# Altium PCB PCB1.PcbDoc
Units mil, origin at the board's own origin, x right, y up, seen from the top; angles counter-clockwise.
Board outline 6000 x 4000 mil, 2 copper layers (Top Layer, Bottom Layer); 46 components, 33 nets, 139 pads, 44 vias.
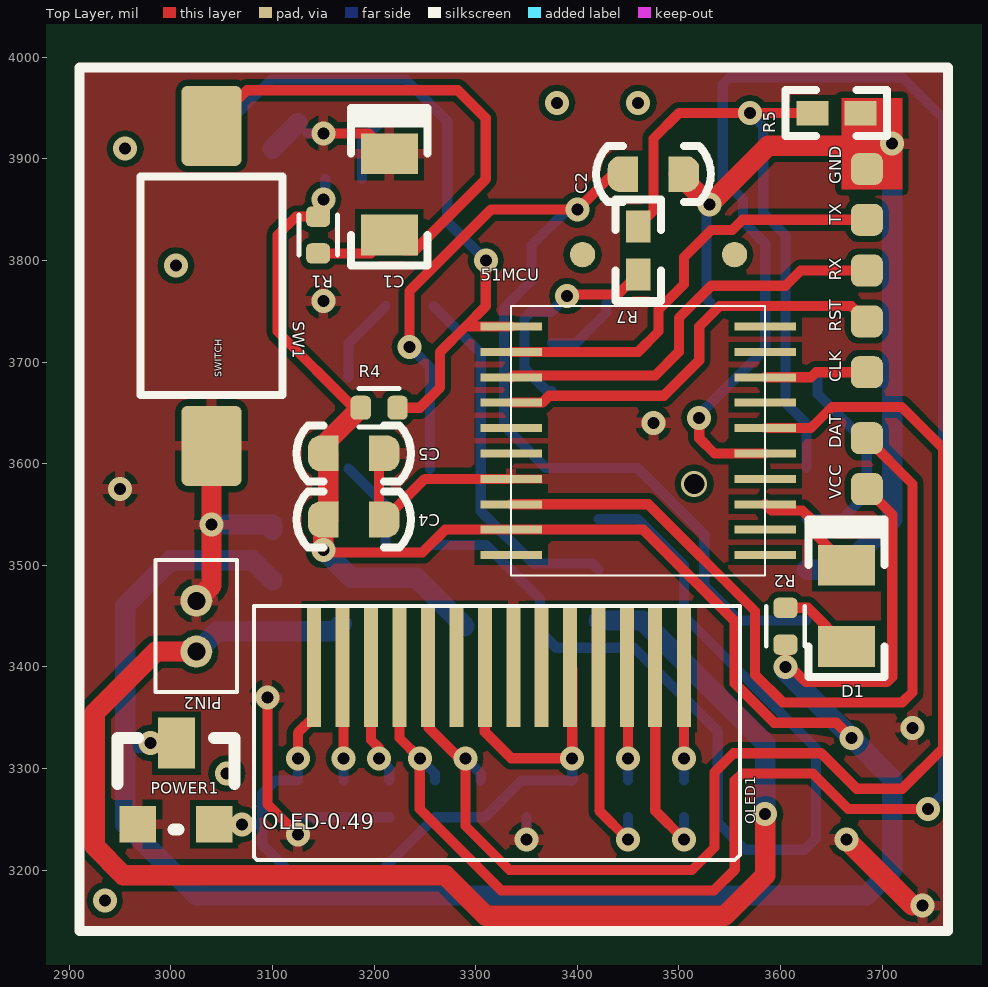
[diagram p0: Top Layer view]
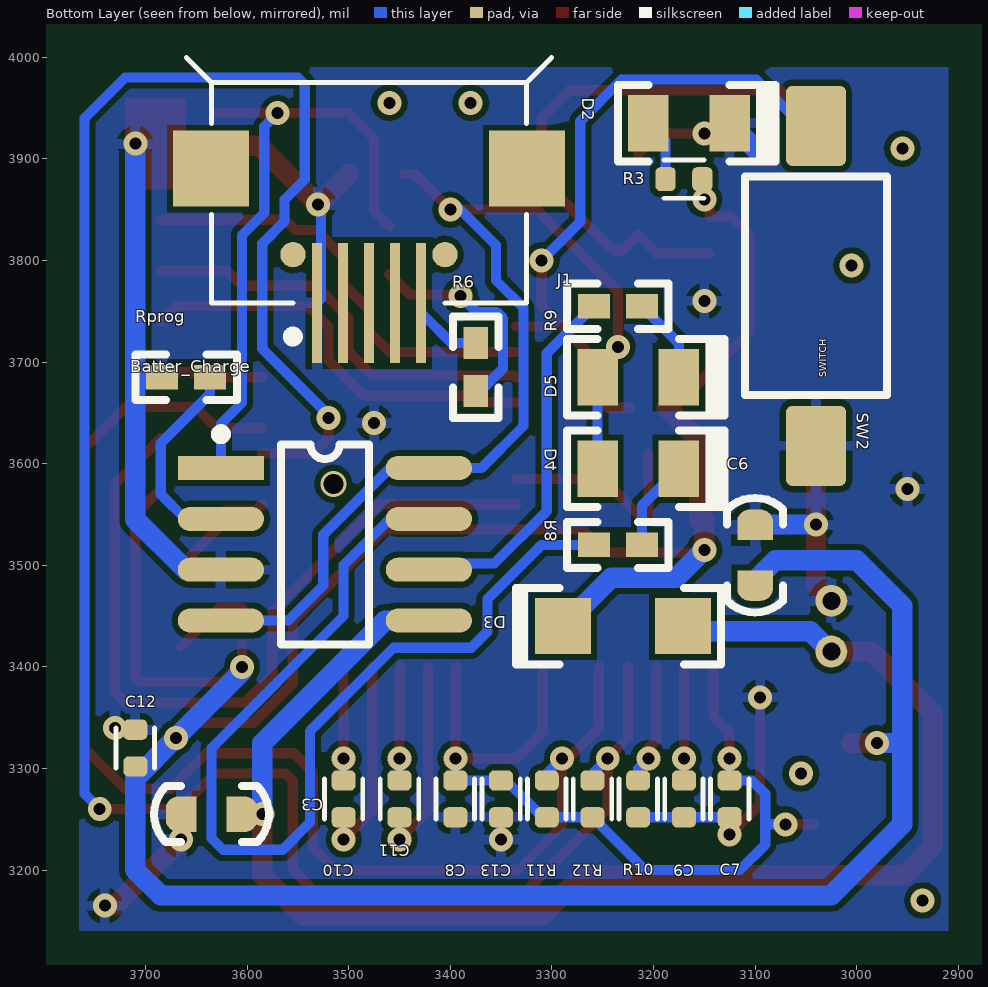
[diagram p1: Bottom Layer view, seen from below]

## Layer stack, top to bottom
Top Layer: signal copper 1.4
Dielectric: dielectric 12.6, FR-4, Dk 4.8
Bottom Layer: signal copper 1.4

## Board outline
1000,1000 7000,1000 7000,5000 1000,5000

## Design rules (kind name [scope] priority, off if disabled: settings)
Clearance [All] p1: gap=6
HoleSize [All] p1 off: absolutevalues=TRUE maxlimit=100 minlimit=1 maxpercent=80.000 minpercent=20.000
HoleToHoleClearance [All] p1 off: gap=0 allowstackedmicrovias=TRUE
LayerPairs [All] p1 off: enforce=TRUE
MinimumSolderMaskSliver [All] p1 off: minsoldermaskwidth=0
NetAntennae [All] p1 off: netantennaetolerance=0
PolygonConnect [All] p1: connectstyle=Relief reliefconductorwidth=10 reliefentries=4 polygonreliefangle="90 Angle"
RoutingVias [All] p1: holewidth=28 width=50 viastyle="Through Hole" minholewidth=28 minwidth=50 maxholewidth=28 maxwidth=50
SilkToSilkClearance [All] p1 off: silktosilkclearance=0
SilkscreenOverComponentPads [All] p1 off: minsilkscreentomaskgap=0
SolderMaskExpansion [All] p1: expansion=4
Width [All] p1: maxlimit=50 minlimit=10 preferedwidth=10
21 further rules are at their usual default settings.

## Components (designator, comment, footprint, x,y, rotation, side; value= is the part's Value field where it differs from the comment)
51MCU "N76E003 TSSOP20" TSSOP20 34260,21490 r0 top
Batter_Charge "TP4056 SOP8" SOP8 3525,3615 r270 bottom
C1 "10U" 0805P 3215,3865 r90 top
C2 "10uF" 0603C 3475,3885 r0 top
C3 "10uF" 0603C 3635,3255 r180 bottom
C4 "104" 0603C 3180,3545 r180 top
C5 "102" 0603C 3180,3610 r180 top
C6 "104" 0603C 3100,3510 r270 bottom
C7 "0.1uF" CAP_0402_SMD 3125,3270 r90 bottom
C8 "0.01uF" CAP_0402_SMD 3395,3270 r270 bottom
C9 "0.01uF" CAP_0402_SMD 3170,3270 r270 bottom
C10 "0.01uF" CAP_0402_SMD 3505,3270 r270 bottom
C11 "0.01uF" CAP_0402_SMD 3450,3270 r270 bottom
C12 "0.01uF" CAP_0402_SMD 3710,3320 r90 bottom
C13 "0.01uF" CAP_0402_SMD 3350,3270 r270 bottom
CLK "TestDot" Single-Dot 3685,3690 r90 top
D1 "LED" 0805P 3665,3460 r90 top
D2 "LED" 0805P 3165,3935 r180 bottom
D3 "0.34V" 1206D 3230,3440 r0 bottom
D4 "LED" 0805P 3215,3595 r180 bottom
D5 "LED" 0805P 3215,3685 r180 bottom
DAT "TestDot" Single-Dot 3685,3625 r90 top
GND "TestDot" Single-Dot 3685,3890 r90 top
J1 "Micro-USB" Micro-USB 3470,3875 r90 bottom
OLED1 "OLED-0.49" OLED-0.49 3505,3400 r180 top
PIN2 "P2-1.27mm" Pin2-1.27mm 3025,3465 r270 top
POWER1 "662K-SOT23" SOT-23 3005,3275 r0 top
R1 "10K" RES_0402_SMD 3145,3825 r90 top
R2 "1K" RES_0402_SMD 3605,3440 r270 top
R3 "1K" RES_0402_SMD 3170,3880 r180 bottom
R4 "10K" RES_0402_SMD 3205,3655 r180 top
R5 "1K" 0402 3655,3945 r180 top
R6 "0.4" 0402 3375,3695 r270 bottom
R7 "1K" 0402 3460,3810 r90 top
R8 "1K" 0402 3235,3520 r180 bottom
R9 "1K" 0402 3235,3755 r180 bottom
R10 "1K" RES_0402_SMD 3215,3270 r90 bottom
R11 "4.7K" RES_0402_SMD 3305,3270 r270 bottom
R12 "4.7K" RES_0402_SMD 3260,3270 r270 bottom
Rprog "1K" 0402 3660,3685 r180 bottom
RST "TestDot" Single-Dot 3685,3740 r90 top
RX "TestDot" Single-Dot 3685,3790 r90 top
SW1 "switch" SWITCH-微型 3040,3775 r90 top
SW2 "switch" SWITCH-微型 3040,3775 r90 bottom
TX "TestDot" Single-Dot 3685,3840 r90 top
VCC "TestDot" Single-Dot 3685,3575 r90 top

## Footprints (in the part's own frame and the unit in brackets; to place one, negate y for a bottom-side part, rotate by r counter-clockwise, add the part's x,y. Pads: shape width x height; smd on the part's side, far side on the other; paste and mask are expansions set on the pad)
0402 [mm]
  rect 0.8x0.61 smd: 1(-0.6,0) 2(0.6,0)
  silkscreen extent -1.27,-0.57 1.27,0.57, body extent -0.48,-0.3 0.5,0.3, height 0.3
0603C [mil]
  rrect80% 30x35 smd: 1(-30,0) 2(30,0)
  rect 20x35 smd: 1(-25,0) 2(25,0)
  silkscreen extent -56,-28 56,28, body extent -31,-16 31,16, height 16
0805P [mil]
  rect 40x56 smd: 1(-40,0) 2(40,0)
  silkscreen extent -70,-38 85,38, body extent -41,-26 42,26, height 20
1206D [mm]
  rect 1.4x1.4 smd: 1(-1.5,0) 2(1.5,0)
  silkscreen extent -2.45,-0.95 2.68,0.96, body extent -1.48,-0.82 1.6,0.82, height 1.3
CAP_0402_SMD [mm] "Capacitor, Polarized, Chip; 1.00 mm L X 0.50 mm W X 0.35 mm H body"
  rrect51% 0.51x0.6 smd: 1(-0.46,0) 2(0.46,0)
  silkscreen extent -0.5,-0.48 0.5,0.48, body extent -0.53,-0.28 0.51,0.28, height 0.53
Micro-USB [mm]
  rect 3x0.25 smd: 1(-2.968,1.554) 2(-2.968,0.904) 3(-2.968,0.254) 4(-2.968,-0.396) 5(-2.968,-1.046)
  round 0.635 all layers, no hole: MH1(-1.76,2.154) MH2(-1.76,-1.646)
  rect 1.9x1.9 smd: ""(0.39,-3.696) ""(0.39,4.204)
  silkscreen extent -3.93,-4.31 3.17,4.82, body extent -2.83,-3.59 2.6,4.39, height 2.73
OLED-0.49 [mm]
  rect 0.35x3 smd: 1(0,0) 2(0.725,0) 3(1.422,0) 4(2.134,0) 5(2.845,0) 6(3.556,0) 7(4.267,0) 8(4.978,0) 9(5.69,0) 10(6.401,0) 11(7.112,0) 12(7.823,0) 13(8.534,0) 14(9.246,0)
  silkscreen extent -1.4,-1.52 10.74,4.83
Pin2-1.27mm [mm]
  round 0.8 hole 0.45: 1(0,0) 2(1.27,0)
  silkscreen extent -1.02,-1.02 2.29,1.02
RES_0402_SMD [mm] "Resistor, Chip; 1.00 mm L X 0.50 mm W X 0.35 mm H body"
  rrect51% 0.51x0.6 smd: 1(-0.46,0) 2(0.46,0)
  silkscreen extent -0.5,-0.48 0.5,0.48, body extent -0.53,-0.28 0.53,0.28, height 0.41
Single-Dot [mm]
  rrect50% 0.8x0.8 smd: 1(0,0)
SOP8 [mil]
  rect 23.62x85 smd: 1(19.45,-100.71)
  oval 23.62x85 smd: 2(69.45,-100.71) 3(119.45,-100.71) 4(169.45,-100.71) 5(169.45,104.02) 6(119.45,104.02) 7(69.45,104.02) 8(19.45,104.02)
  silkscreen extent -19,-106 193,45
SOT-23 [mil]
  rect 36x36 smd: 1(-37.48,-30.03) 2(37.52,-30.03)
  rect 36x50 smd: 3(0.52,49.97)
  silkscreen extent -57,-35 58,55
SWITCH-微型 [mm]
  rrect20% 2x1.5 smd: 1(-4,0) 2(4,0)
  silkscreen extent -2.73,-1.78 2.73,1.78, body extent -2.8,-1.8 2.8,1.8, height 2.61
TSSOP20 [mil]
  rect 60.71x7.87 smd: 1(-30925,-17755) 2(-30925,-17780) 3(-30925,-17805) 4(-30925,-17830) 5(-30925,-17855) 6(-30925,-17880) 7(-30925,-17905) 8(-30925,-17930) 9(-30925,-17955) 10(-30925,-17980) 11(-30675,-17980) 12(-30675,-17955) 13(-30675,-17930) 14(-30675,-17905) 15(-30675,-17880) 16(-30675,-17855) 17(-30675,-17830) 18(-30675,-17805) 19(-30675,-17780) 20(-30675,-17755)
  silkscreen extent -30925,-18000 -30675,-17735

## Part data
C7 C8 C9 C10 C11 C12 C13: library part Cap, "Capacitor"
R1 R2 R3 R4 R10 R11 R12: library part Res2, "Resistor"
R5 R6 R7 R8 R9 Rprog: library part resistor

## Via types
v1: diameter 23.6, hole 11.8, Top Layer to Bottom Layer, 43 vias
v2: diameter 25.6, hole 20, Top Layer to Bottom Layer, 1 vias

## Nets (pads, with @x,y where several pads share a name; then routed paths per layer and width w, separated by ;. In a path a pad name is that pad's centre, name@x,y a point inside that pad or via, vN(x,y) a via of type N, cw(c..) or ccw(c..) an arc to the next point about the centre after c; other vN are vias at no path point)
BAT+: Batter_Charge.5 C3.2 D3.1 PIN2.2 | length 1460.3
  Top Layer w20: PIN2.2 2985,3415 2925,3355 2925,3223.2 2953.2,3195 3270,3195 3310,3155 3545,3155 3585,3195 v1(3585,3255)
  Bottom Layer w20: PIN2.2 3025.56,3415 3045.56,3435 3160.95,3435 D3.1@3168.44,3442.5 ; Batter_Charge.5 3464.45,3445.55 3585,3325 v1(3585,3255)
C1N: C11.2 OLED1.4 | length 203.9
  Top Layer w10: OLED1.4 3421.8,3399.2 3421.8,3258.2 v1(3450,3230)
  Bottom Layer w10: v1(3450,3230) C11.2
C1P: C11.1 OLED1.3 | length 112.3
  Top Layer w10: OLED1.3 3450,3399 v1(3450,3310)
  Bottom Layer w10: C11.1 v1(3450,3310)
C2N: C10.2 OLED1.2 | length 203.7
  Top Layer w10: OLED1.2 3476.8,3399.66 3476.8,3258.2 v1(3505,3230)
  Bottom Layer w10: v1(3505,3230) C10.2
C2P: C10.1 OLED1.1 | length 111.9
  Top Layer w10: v1(3505,3310) OLED1.1
  Bottom Layer w10: C10.1 v1(3505,3310)
GND: 51MCU.7 Batter_Charge.3 C1.2 C2.2 C3.1 C4.1 C5.1 C6.1 C7.1 C8.2 C9.2 C12.2 C13.2 D2.2 GND.1 J1.1 OLED1.7 PIN2.1 POWER1.1 R5.1 R10.1 Rprog.1 SW1.1 SW2.1 | length 1792.1
  Top Layer w10: v1(3095,3370) 3095,3265 v1(3125,3235) ; v1(3150,3925) 3195,3925 C1.2 ; C5.1@3205,3610 3205,3545 3210,3545 3250,3585 51MCU.7 ; v1@3730,3165 v1(3740,3165)
  Top Layer w20: PIN2.1 3040,3480 v1(3040,3540) SW1.1 ; C2.2@3500,3885 v1(3530,3855) 3588,3913 3708,3913 v1(3710,3915) ; v1(3665,3230) v1@3730,3165
  Bottom Layer w10: v1(3125,3235) C7.1 C9.2 R10.1 ; D2.2@3135,3925 v1(3150,3925) ; v1(3350,3230) C13.2 ; v1(3530,3855) 3527.3,3852.3 3527.3,3762.03 J1.1
  Bottom Layer w20: PIN2.1 PIN2.1@3030,3465 ; v1(3040,3540) 3095,3540 3100,3535 C6.1@3100,3540 ; 3100,3910 D2.2 ; Batter_Charge.3 3660.55,3495.55 3710,3545 3710,3685 ; Rprog.1 3710,3685 ; v1(3710,3915) 3710,3685
  other v1: 3730,3340 2950,3575 3475,3640 3150,3760
IREF: OLED1.12 R10.2 | length 119.3
  Top Layer w10: OLED1.12 3197,3328 3205,3320 v1(3205,3310)
  Bottom Layer w10: v1(3205,3310) 3215,3300 R10.2
KEY_MONITER: 51MCU.1 R4.1 SW2.2 | length 659.5
  Top Layer w10: R4.1 3245,3655 3265,3675 3265,3710 3290,3735 ; v1(3310,3800.04) 3310,3755 3290,3735 ; 51MCU.1 3290,3735
  Bottom Layer w10: SW2.2 3053.27,3932.48 3098.79,3978 3231.21,3978 3272.09,3937.13 3272.09,3837.95 v1(3310,3800.04)
LED1: 51MCU.13 D1.2 | length 111
  Top Layer w10: 51MCU.13 3591.06,3553.94 3621.57,3553.94 3630.35,3545.15 3630.35,3534.65 D1.2
NetBatter_Charge_1: Batter_Charge.1 R5.2 R7.2 | length 631.8
  Top Layer w10: R7.2 3475,3848.62 3475,3920 3500,3945 R5.2
  Bottom Layer w10: v1(3570,3945) 3583.11,3931.89 3583.11,3846.74 3605,3824.85 3605,3660 3625.71,3639.29 Batter_Charge.1
NetBatter_Charge_2: Batter_Charge.2 Rprog.2 | length 204.6
  Bottom Layer w10: Batter_Charge.2 3660.55,3545.55 3685,3570 3685,3620 3636.38,3668.62 Rprog.2
NetBatter_Charge_4: Batter_Charge.4 Batter_Charge.8 C2.1 D4.1 D5.1 | length 1095.9
  Top Layer w10: v1(3235,3715) 3235,3770 3315,3850 v1(3400,3850) 3435,3885 C2.1@3445,3885
  Bottom Layer w10: v1(3235,3715) 3255,3695 D5.1 D4.1 ; v1(3400,3850) 3390,3850 3355,3815 3355,3780.28 3328,3753.28 3328,3637 3369.45,3595.55 Batter_Charge.8 3459.45,3595.55 3525,3530 3525,3480 3559.45,3445.55 Batter_Charge.4
NetBatter_Charge_6: Batter_Charge.6 R9.1 | length 360.8
  Bottom Layer w10: R9.1 3305,3708.62 3305,3553.28 3356.48,3501.8 3414.74,3501.8 Batter_Charge.6
NetBatter_Charge_7: Batter_Charge.7 R8.1 | length 1002.1
  Bottom Layer w10: R8.1 3310,3520 3363.48,3466.52 3363.48,3434.45 3379.19,3418.74 3455.9,3418.74 3538.2,3336.44 3538.2,3246.8 3565,3220 3623.71,3220 3635,3231.29 3635,3320 3505,3450 3505,3500 3459.45,3545.55 Batter_Charge.7
NetC1_1: C1.1 R1.1 SW1.2 | length 563.6
  Top Layer w10: SW1.2 3075,3967.48 3282.52,3967.48 3310,3940 3310,3880 3240,3810 3230,3810 C1.1 3196.89,3806.89 R1.1
NetD1_1: D1.1 R2.1 | length 75.8
  Top Layer w10: R2.1 3626.89,3458.11 D1.1
NetD2_1: D2.1 R3.1 | length 62
  Bottom Layer w10: R3.1 3188.11,3918.11 D2.1
NetD4_2: D4.2 R8.2 | length 90.1
  Bottom Layer w10: D4.2 3211.38,3558.62 R8.2
NetD5_2: D5.2 R9.2 | length 85.1
  Bottom Layer w10: D5.2 3175,3718.62 R9.2
NetJ1_5: J1.5 R6.1 | length 75.7
  Bottom Layer w10: R6.1 3398.62,3718.62 3428.82,3748.82 J1.5
NetR6_2: R6.2 R7.1 | length 216.3
  Top Layer w10: v1(3390,3765) 3391.38,3766.38 3440,3766.38 R7.1
  Bottom Layer w10: R6.2 3370.53,3671.38 3348.45,3693.45 3348,3693 3348,3743 3354.37,3749.37 3374.37,3749.37 v1(3390,3765)
RES: OLED1.9
SCL: 51MCU.16 OLED1.10 R11.1 | length 1309.3
  Top Layer w10: OLED1.10 3253.84,3399.16 3253.84,3340 3283.84,3310 v1(3290,3310) 3290,3243.28 3333.28,3200 3512.9,3200 3535,3222.1 3535,3296.19 3553.81,3315 3640,3315 3675,3280 3720,3280 3760,3320 3760,3615 3719.25,3655.75 3650.75,3655.75 3630,3635 51MCU.16
  Bottom Layer w10: v1(3290,3310) 3305,3295 R11.1
SDA: 51MCU.15 OLED1.11 R12.1 | length 2209
  Top Layer w10: OLED1.11 3225,3330 v1(3245,3310) 3245,3260 3325,3180 3534.64,3180 3555,3200.36 3555,3287.9 3562.1,3295 3631.72,3295 3666.72,3260 v1(3745,3260) ; v1(3520,3645) 3520,3625 3535,3610 51MCU.15
  Bottom Layer w10: v1(3245,3310) 3260,3295 R12.1 ; v1(3520,3645) 3520,3648.18 3585,3713.18 3585,3816.57 3563.11,3838.46 3563.11,3859.79 3543.2,3879.7 3543.2,3973.2 3550,3980 3720,3980 3760,3940 3760,3275 v1(3745,3260)
TICECLK: 51MCU.18 CLK.1 | length 102.1
  Top Layer w10: 51MCU.18 3630,3685 3635,3690 CLK.1
TICEDAT: 51MCU.8 DAT.1 | length 785.4
  Top Layer w10: 51MCU.8 3470,3560 3575,3455 3575,3392.1 3602.1,3365 3720,3365 3730,3375 3730,3580 DAT.1
TICERST: 51MCU.4 RST.1 | length 415.1
  Top Layer w10: 51MCU.4 3365.5,3660 3372.3,3666.8 3485.08,3666.8 3520,3701.72 3520,3735 3540,3755 3670,3755 RST.1
TINY_RX: 51MCU.3 RX.1 | length 413
  Top Layer w10: 51MCU.3 3336.8,3686.8 3476.8,3686.8 3500,3710 3500,3743.28 3531.72,3775 3605,3775 3620,3790 RX.1
TINY_TX: 51MCU.2 TX.1 | length 432.1
  Top Layer w10: 51MCU.2 3460,3710 3480,3730 3480,3751.57 3505,3776.57 3505,3803.2 3531.8,3830 3552.58,3830 3562.58,3840 TX.1
VBAT: C7.2 C8.1 C13.1 OLED1.5 OLED1.8 OLED1.14 POWER1.2 R11.2 R12.2 | length 881.7
  Top Layer w10: POWER1.2@3042.55,3245 v1(3070,3245) ; v1(3125,3310) 3125,3335 3141,3351 OLED1.14 ; OLED1.8 3309,3336 3335,3310 v1(3395,3310) 3395,3398 OLED1.5
  Bottom Layer w10: v1(3070,3245) 3090,3245 ; v1(3125,3310) C7.2 3103.11,3288.11 3090,3275 3090,3245 ; v1(3395,3310) C8.1 C13.1 3345.06,3288.11 3308.84,3251.89 R11.2 R12.2 3208.11,3200 3115,3200 3090,3225 3090,3245
VBREF: OLED1.6
VCC: 51MCU.9 C4.2 C5.2 C6.2 C12.1 D3.2 POWER1.3 R1.2 R2.2 R3.2 R4.2 VCC.1 | length 3059.4
  Top Layer w10: v1(3150,3515) 3152.5,3512.5 3247.5,3512.5 3270,3535 51MCU.9 3465,3535 3555,3445 3555,3383.81 3593.81,3345 3655,3345 v1(3670,3330) ; v1(3150,3860) 3145,3855 R1.2 3123.11,3843.11 3105,3825 3105,3730 3180,3655 R4.2 ; R2.2 3605,3405 3625,3385 3705,3385 3710,3390 3710,3550 VCC.1
  Top Layer w20: v1(2980,3325) POWER1.3 ; v1(3150,3515) C4.2@3150,3545 ; C4.2@3155,3545 C5.2@3155,3610 ; C5.2@3155,3623.11 R4.2
  Bottom Layer w10: v1(3150,3860) 3151.89,3861.89 R3.2 ; v1@3605,3395 v1(3605,3400)
  Bottom Layer w20: v1(2980,3325) 2955,3325 ; C6.2@3100,3485 3080,3505 3000,3505 2955,3460 2955,3325 ; v1(3150,3515) 3177.44,3487.56 3241.5,3487.56 D3.2 ; v1@3605,3395 v1(3670,3330) 3710,3290 3710,3200 3685,3175 3025,3175 2955,3245 2955,3325
VCOMH: C9.1 OLED1.13 | length 112.3
  Top Layer w10: OLED1.13 3170,3399 v1(3170,3310)
  Bottom Layer w10: C9.1 v1(3170,3310)
pads on no net: 51MCU.5 51MCU.6 51MCU.10 51MCU.11 51MCU.12 51MCU.14 51MCU.17 51MCU.19 51MCU.20 J1. J1.2 J1.3 J1.4 J1.MH1 J1.MH2
copper on no net:
  other v1: 2935,3170 3055,3295 3005,3795 2955,3910 3380,3955 3460,3955
  other v2: 3515,3580

## Polygon pours and split planes (outlines as drawn)
GND on Top Layer "Top Layer-No Net" (solid, pour order 1000): 3765,3990 2910,3990 2910,3140 3765,3140 3765,3990
GND on Bottom Layer "Top Layer-No Net" (solid, pour order 1001): 3765,3990 2910,3990 2910,3140 3765,3140 3765,3990

## Other copper
Top Layer:
  rectangle net GND: 3660,3870 3720,3960

## Silkscreen, mask and mechanical layers (free items; w line width, h text height)
Top Overlay:
  lines w10: 2910,3140 3765,3140 3765,3990 2910,3990 2910,3140

## Text inside footprints (layer, text, board x,y; h text height)
SW1: Top Overlay "SWITCH" at 3052.5,3685 h11.81 r90
SW2: Bottom Overlay "SWITCH" at 3027.5,3685 h11.81 r270